# Altium PCB PCB1.PcbDoc (part 1 of 2)
Units mm, origin at the board's own origin, x right, y up, seen from the top; angles counter-clockwise.
Board outline 45.5 x 25.8 mm, 4 copper layers (Top Copper, Signal Layer 1, Signal Layer 2, Bottom Copper), stack 1.59 mm thick; 62 components, 46 nets, 226 pads, 305 vias.
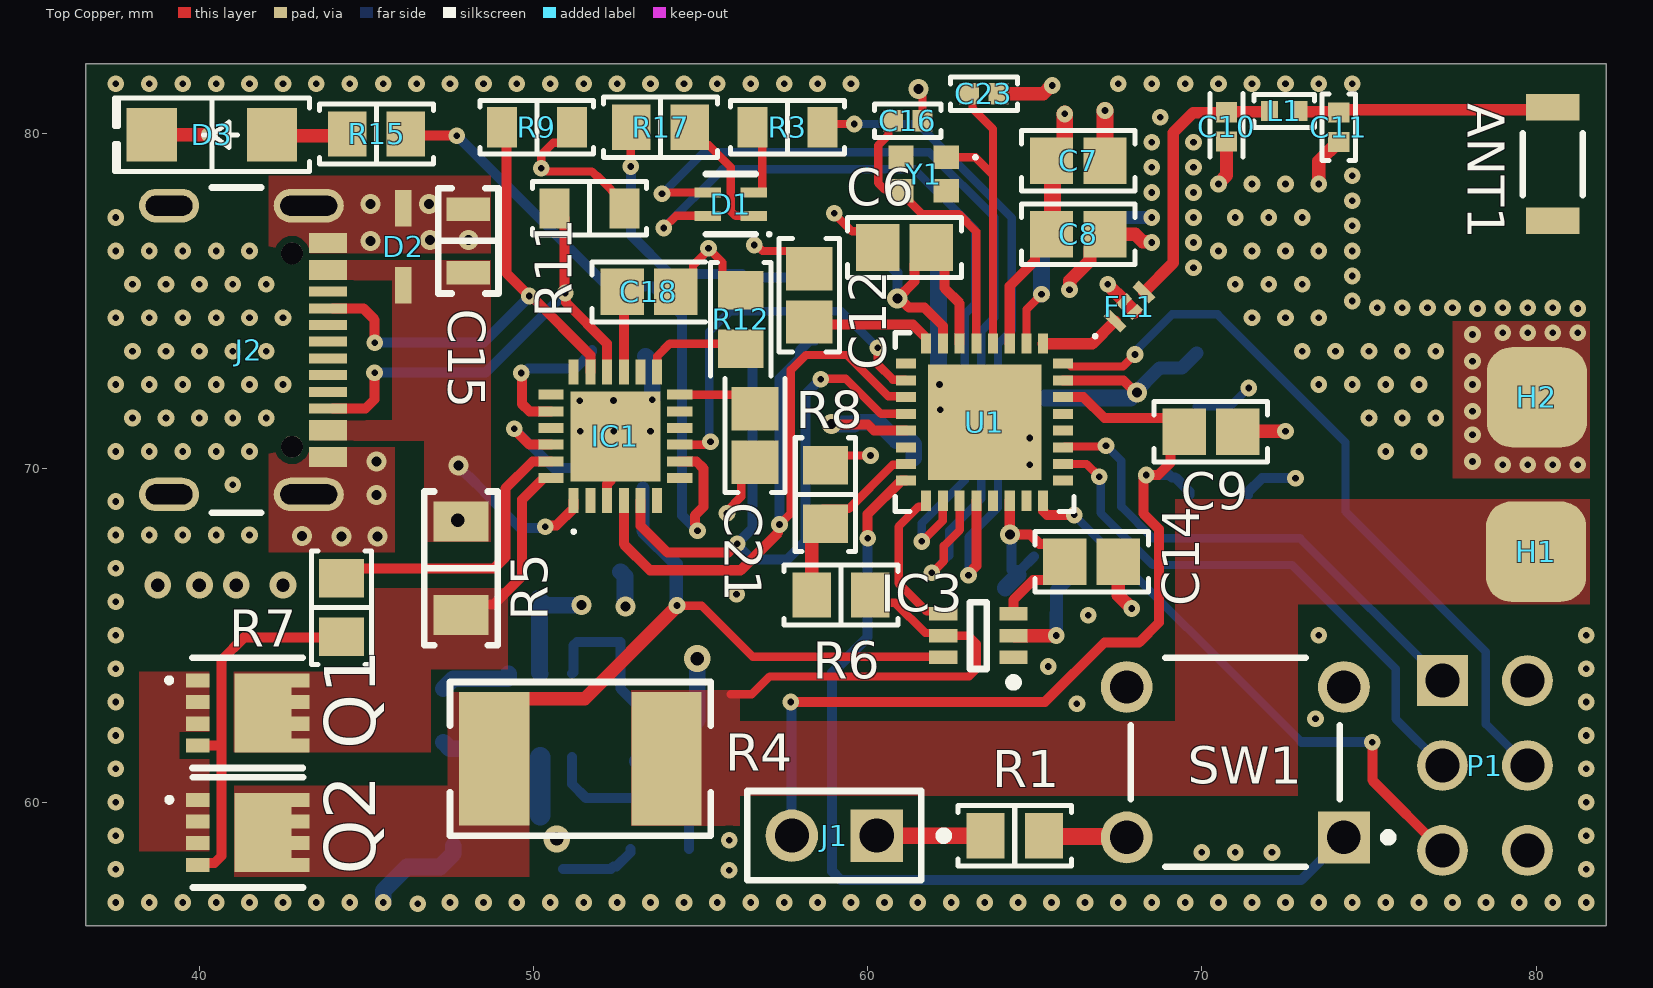
[diagram p0: Top Copper view]
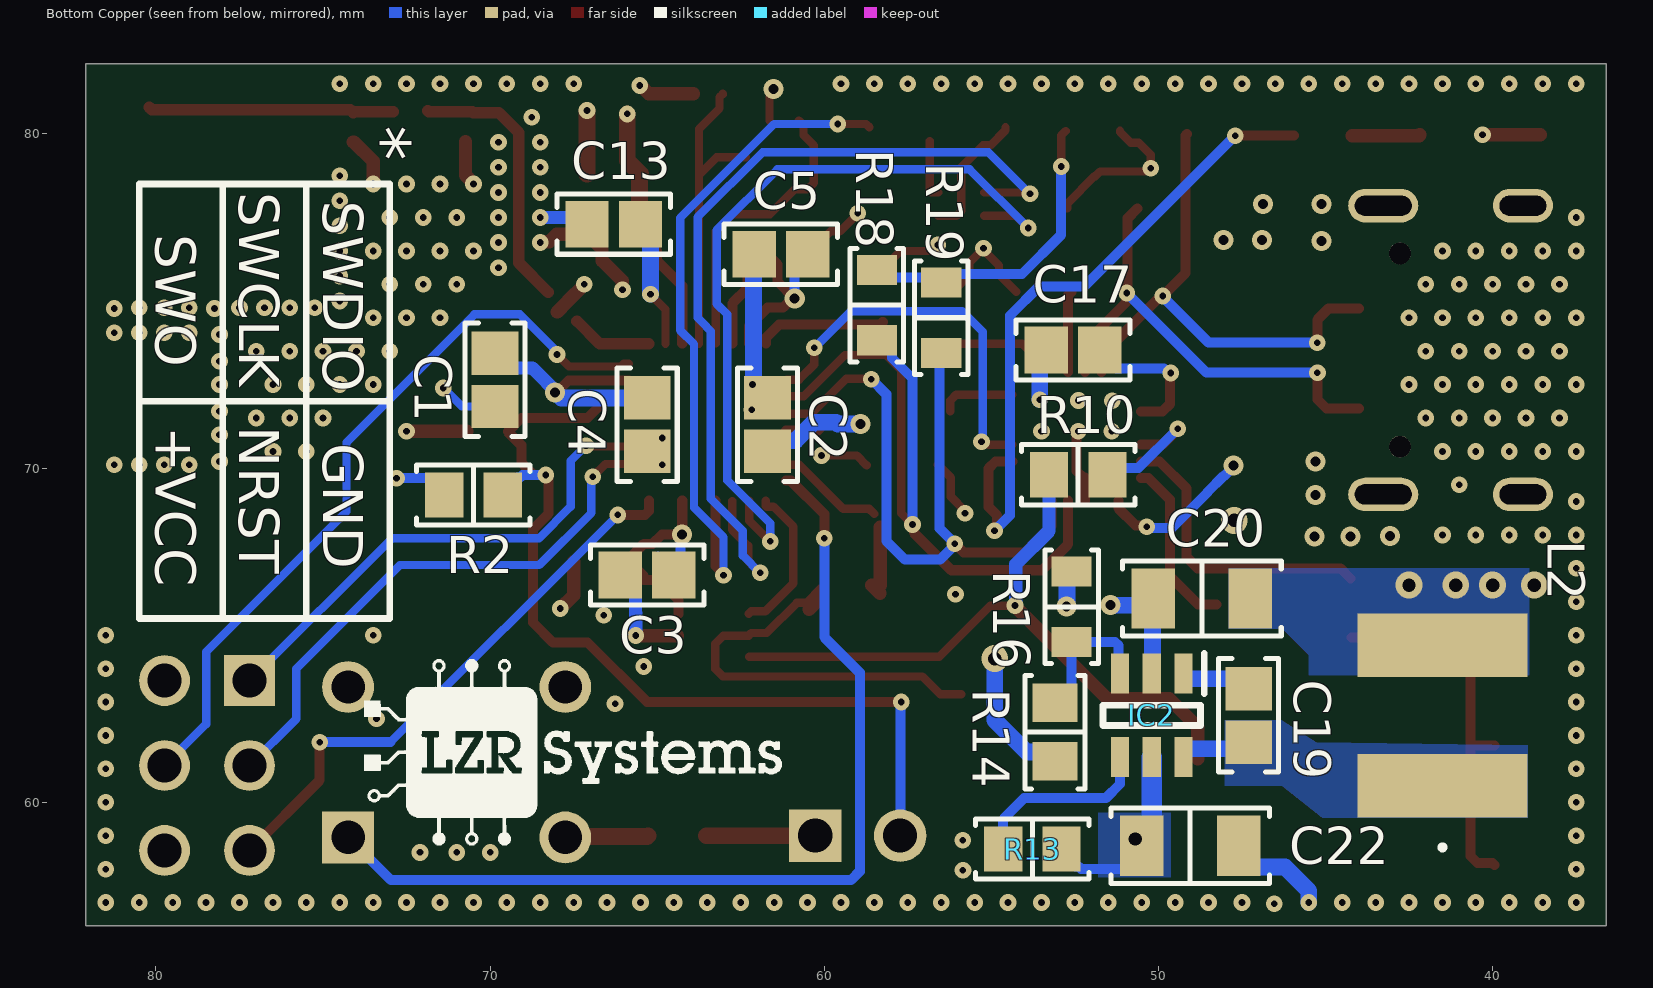
[diagram p1: Bottom Copper view, seen from below]
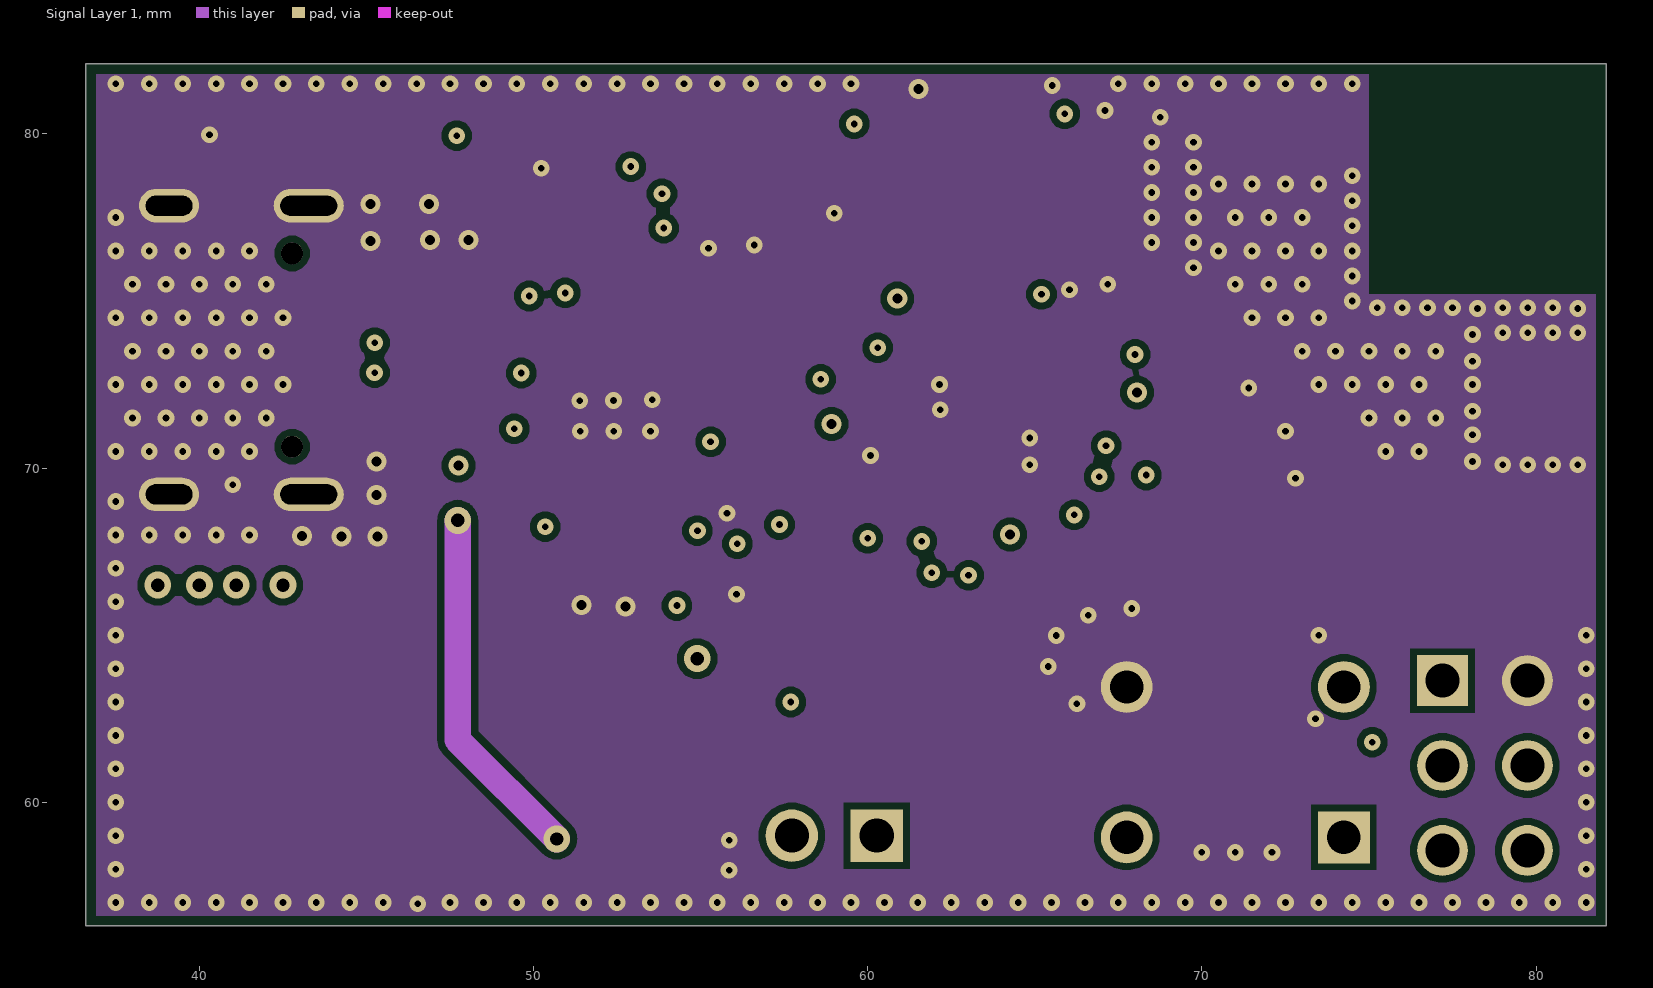
[diagram p2: Signal Layer 1]
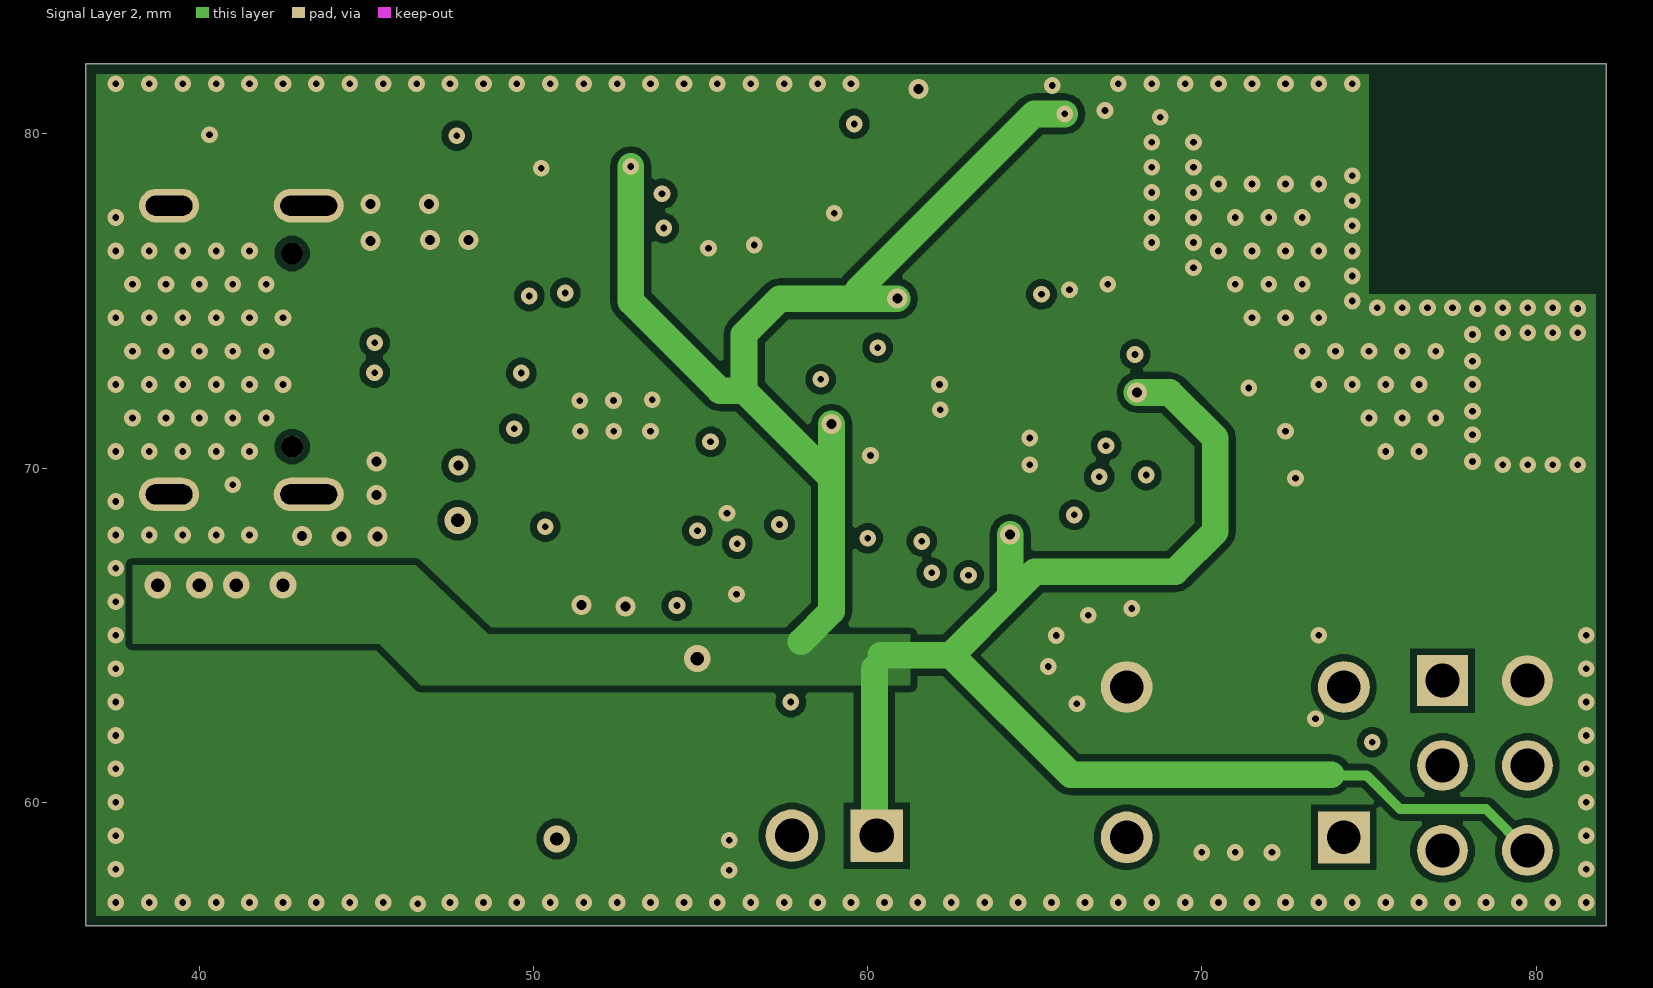
[diagram p3: Signal Layer 2]
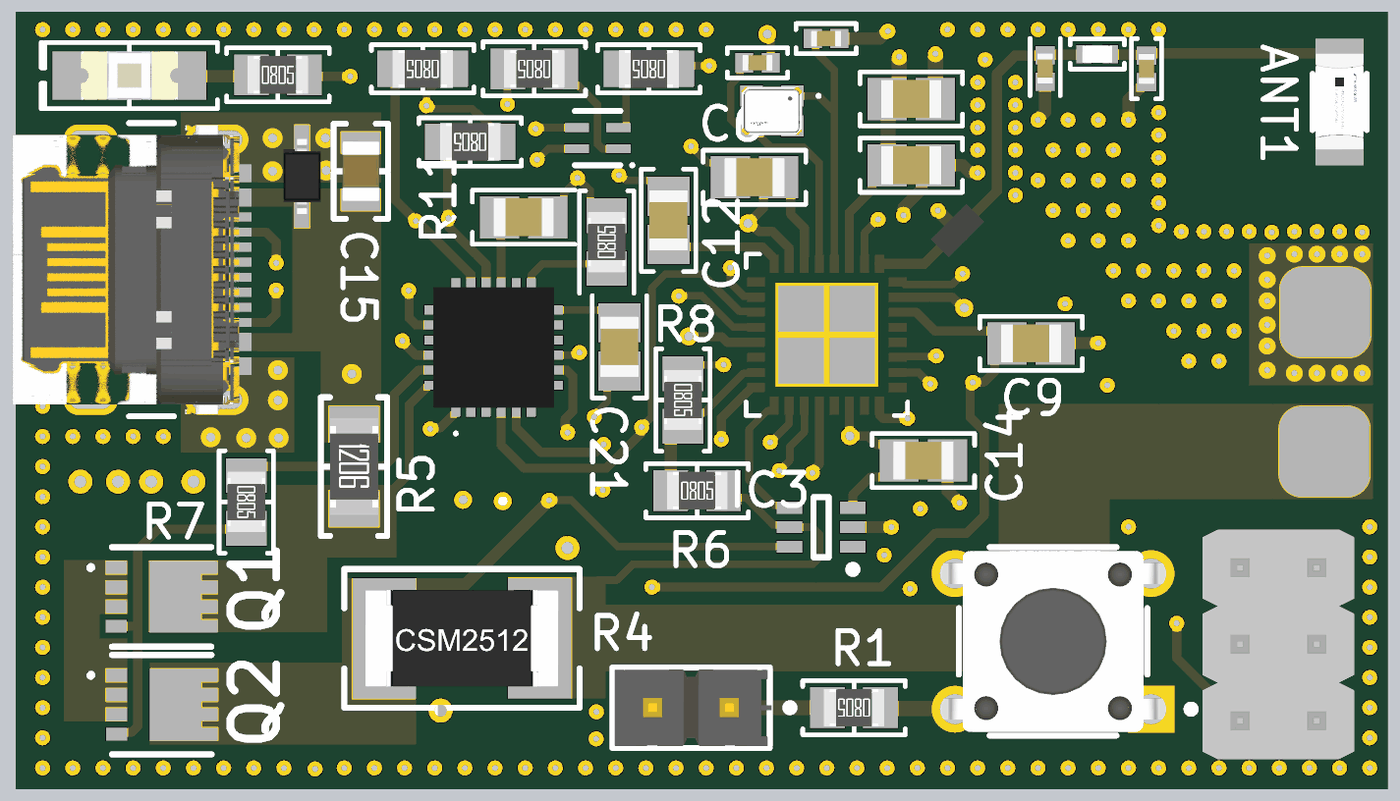
[diagram p4: 3D render of the assembled board from above, using the file's embedded part models]
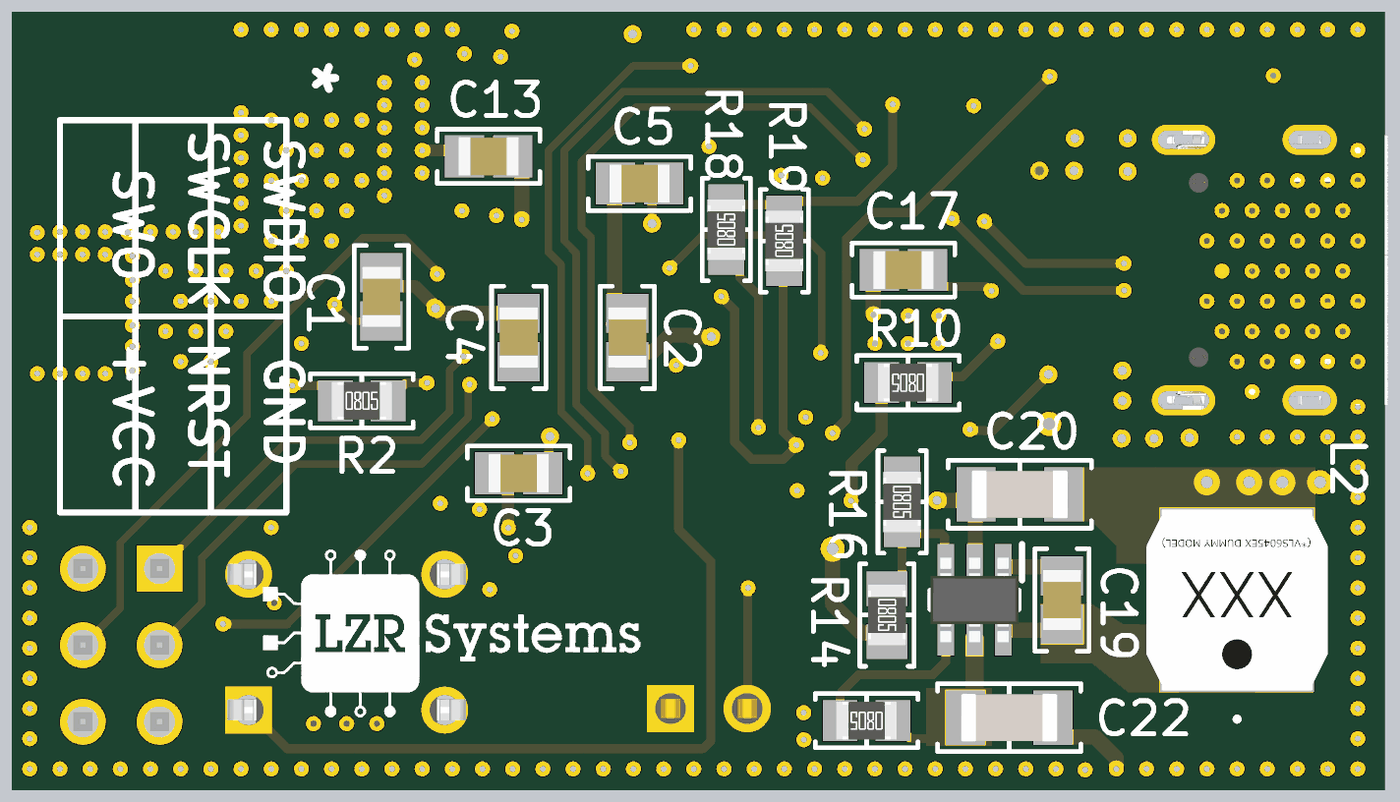
[diagram p5: 3D render of the assembled board from below, using the file's embedded part models]

## Layer stack, top to bottom
Top Mask: solder mask 0.015, Solder Resist, Dk 3.8
Top Copper: signal copper 0.035
Dielectric 1: prepreg 0.2104, 7628, Dk 4.6
Signal Layer 1: signal copper 0.0152
Core: core 1.065, FR-4, Dk 4.5
Signal Layer 2: signal copper 0.0152
Dielectric 2: prepreg 0.214, 7628, Dk 4.6
Bottom Copper: signal copper 0.035
Bottom Mask: solder mask 0.015, Solder Resist, Dk 3.8

## Board outline
36.6,56.3 36.6,82.1 82.1,82.1 82.1,56.3

## Design rules (kind name [scope] priority, off if disabled: settings)
BoardOutlineClearance [All] p1: gap=0.3 ignorepadtopadclearanceinfootprint=FALSE except(0.4: Arc-SplitBarrior Arc-SplitContinuation Track-SplitBarrior Track-SplitContinuation SMDPad-SplitBarrior SMDPad-SplitContinuation THPad-SplitBarrior THPad-SplitContinuation Via-SplitBarrior Via-SplitContinuation Fill-SplitBarrior Fill-SplitContinuation Poly-SplitBarrior Poly-SplitContinuation Region-SplitBarrior Region-SplitContinuation Text-SplitBarrior Text-SplitContinuation)
Clearance "Clearance Different Nets" [All] p1: gap=0.2 ignorepadtopadclearanceinfootprint=FALSE except(0.089: Arc-Arc Arc-Track Arc-SMDPad Track-Track Track-SMDPad; 0.127: SMDPad-SMDPad SMDPad-Via THPad-Via Via-Via; 0.15: Arc-Via Track-Via; 0.254: Arc-Text Track-Text SMDPad-Text THPad-Text Via-Text Fill-Text Poly-Text Region-Text Text-Text; 0.5: THPad-THPad Via-Hole)
Clearance "Clearance Same Nets" [All] p2: gap=0.2 ignorepadtopadclearanceinfootprint=FALSE except(0: SMDPad-THPad SMDPad-Via SMDPad-Fill SMDPad-Poly SMDPad-Region SMDPad-Hole THPad-Via Via-Fill Via-Poly Via-Region; 0.089: Arc-Arc Arc-Track Arc-SMDPad Track-Track Track-SMDPad SMDPad-SMDPad; 0.254: Arc-Via Arc-Text Track-Via Track-Text SMDPad-Text THPad-Text Via-Text Fill-Text Poly-Text Region-Text Text-Text)
Clearance "Clearance Bottom Layer" [OnLayer('Bottom Layer')] p3: gap=0.203 ignorepadtopadclearanceinfootprint=TRUE except(0.254: Arc-Text Track-Text SMDPad-Text THPad-Text Via-Text Fill-Text Poly-Text Region-Text Text-Text)
Clearance "Clearance Top Layer" [OnLayer('Top Layer')] p4: gap=0.203 ignorepadtopadclearanceinfootprint=TRUE except(0.254: Arc-Text Track-Text SMDPad-Text THPad-Text Via-Text Fill-Text Poly-Text Region-Text Text-Text)
ComponentClearance [All] p1 off: gap=0.254 collisioncheckmode=3 verticalgap=0.254 showdistances=FALSE
Height [All] p1 off: minheight=0 maxheight=25.4 prefheight=12.7
HoleSize [All] p1: absolutevalues=TRUE maxlimit=6.3 minlimit=0.2 maxpercent=80.000 minpercent=20.000
MinimumAnnularRing [All] p1: minimumring=0.13
MinimumSolderMaskSliver [All] p1: minsoldermaskwidth=0.1
PolygonConnect PolygonConnect_1 [All] p1: connectstyle=Direct reliefconductorwidth=0.508 reliefentries=4 polygonreliefangle="90 Angle" airgapwidth=0.254
RoutingCorners [All] p1: cornerstyle=Round minsetback=2.54 maxsetback=2.54
RoutingVias [All] p1: holewidth=0.3 width=0.6 viastyle="Through Hole" minholewidth=0.2 minwidth=0.35 maxholewidth=1 maxwidth=2
RoutingVias RoutingVias_1 [All] p2: holewidth=0.2 width=0.5 viastyle="Through Hole" minholewidth=0.2 minwidth=0.35 maxholewidth=1 maxwidth=2
SilkToSilkClearance [All] p1: silktosilkclearance=0.1
SilkToSolderMaskClearance [IsPad] p1: minsilkscreentomaskgap=0.1 clearancetoexposedcopper=TRUE
SolderMaskExpansion [All] p1: expansion=0.03 istentingtop=FALSE
SupplyNets "Schematic Supply Nets_3" [InNet('+VOUT')] p1: voltage=0.000
SupplyNets "Schematic Supply Nets_2" [InNet('+2.9V')] p2: voltage=0.000
SupplyNets "Schematic Supply Nets_1" [InNet('+VBUS')] p3: voltage=0.000
SupplyNets "Schematic Supply Nets" [InNet('GND')] p4: voltage=0.000
Width 50R [InNetClass('50R')] p1: maxlimit=0.351 minlimit=0.264 preferedwidth=0.351 toplayer_minwidth=0.345 toplayer_maxwidth=0.345 toplayer_prefwidth=0.345 midlayer1_maxwidth=0.264 midlayer1_prefwidth=0.264 midlayer2_minwidth=0.269 midlayer2_maxwidth=0.269 midlayer2_prefwidth=0.269 bottomlayer_minwidth=0.351 impedanceprofiledriven=TRUE impedanceprofileid={50FB1EAE-294E-47AF-B670-191B45C0B15C} impedanceprofilevalue=50.000000 minimp=50.000000 maximp=50.000000 favimp=50.000000
Width Width_1 [All] p2: maxlimit=10 minlimit=0.2 preferedwidth=0.25
23 further rules are at their usual default settings.

## Classes and differential pairs
component class U_PowerDelivery: C14 C15 C17 C18 C19 C20 C21 C22 D2 D3 H1 H2 IC1 IC2 IC3 J2 L2 Q1 Q2 R4 R5 R6 R7 R8 R9 R10 R11 R12 R13 R14 R15 R16
component class Control: ANT1 C1 C2 C3 C4 C5 C6 C7 C8 C9 C10 C11 C12 C13 C16 C23 D1 FL1 J1 L1 P1 R1 R2 R3 R17 R18 R19 SW1 U1 Y1

## Components (designator, comment, footprint, x,y, rotation, side; value= is the part's Value field where it differs from the comment)
ANT1 "AMCA31-2R450G-S1F-T3" FP-AMCA31-MFG 80.5,79.1 r270 top
C1 "4.7µF" "CAP 0805_2012" 69.85,72.644 r90 bottom
C2 "0.1 µF" "CAP 0805_2012" 61.7,71.3 r270 bottom
C3 "0.1 µF" "CAP 0805_2012" 65.3,66.8 r180 bottom
C4 "0.1 µF" "CAP 0805_2012" 65.3,71.3 r90 bottom
C5 "0.1 µF" "CAP 0805_2012" 61.3,76.4 r180 bottom
C6 "0.1 µF" "CAP 0805_2012" 61.1,76.6 r0 top
C7 "4.7µF" "CAP 0805_2012" 66.3,79.2 r180 top
C8 "0.1 µF" "CAP 0805_2012" 66.3,77 r180 top
C9 "0.1 µF" "CAP 0805_2012" 70.27,71.09 r180 top
C10 "3.6 pF" "CAP 0402_1005" 70.737,80.209 r90 top
C11 "3.6 pF" "CAP 0402_1005" 74.1,80.2 r90 top
C12 "4.7µF" "CAP 0805_2012" 58.25,75.172 r270 top
C13 "1µF" "CAP 0805_2012" 66.3,77.3 r0 bottom
C14 "0.1 µF" "CAP 0805_2012" 66.7,67.2 r180 top
C15 "10 µF" "MURATA GRM21B 0805_2012" 48.05,76.8 r270 top
C16 "10 pF" "CAP 0402_1005" 61.2,80.4 r180 top
C17 "1µF" "CAP 0805_2012" 52.555,73.533 r0 bottom
C18 "0.1 µF" "CAP 0805_2012" 53.45,75.275 r180 top
C19 "0.1 µF" "CAP 0805_2012" 47.3,62.6 r270 bottom
C20 "22 µF" "CAP 1206_3216 - 0.8MM" 48.7,66.1 r180 bottom
C21 "0.1 µF" "CAP 0805_2012" 56.625,70.975 r90 top
C22 "2.2 µF" "CAP 1206_3216 - 0.8MM" 49.05,58.7 r0 bottom
C23 "10 pF" "CAP 0402_1005" 63.475,81.2 r180 top
D1 "CLMUD-FKC-CH1NP1561BB7T4S3" SON70P150X100-4N 55.9,77.9 r180 top
D2 "PESD24VS1UA,115" SOD2512X110N 46.1,76.625 r90 top
D3 "Red" "LED 1206_3216 RED" 40.375,79.975 r180 top
FL1 "DLF162500LT-5028A1" DLF162500LT5028A1 67.833,74.833 r45 top
H1 "Solder Pad - 3x3mm" "Solder Pad - 3x3mm-Footprint-1"#1 80,67.5 r0 top
H2 "Solder Pad - 3x3mm" "Solder Pad - 3x3mm-Footprint-1"#2 80.026,72.118 r0 top
IC1 "AP33772SDKZ-13-FA01" AP33772SDKZ13FA01 52.45,70.95 r90 top
IC2 "DCP3601NMR" SOT95P280X125-6N 50.2,62.6 r270 bottom
IC3 "MCP6C26T-100E/LTY" SOT65P210X80-6N 63.312,64.989 r180 top
J1 "TSW-102-12-T-S" FP-TSW-102-12-T-S-MFG 59,59 r180 top
J2 "USB4105-GF-A" FP-USB4105-GF-A-MFG 40.258,73.533 r270 top
L1 "TBD" "IND 0402_1005" 72.465,80.688 r0 top value="3.9 nH"
L2 "VLS6045EX-150M" VLS6045 41.5,62.6 r90 bottom
P1 "MTLW-103-06-G-D-180" SMTC-MTLW-103-06-X-D-180 77.2,63.64 r270 top
Q1 "DMN3009SFG-7" DMTH8008LFGQ7 42.755,62.675 r270 top
Q2 "DMN3009SFG-7" DMTH8008LFGQ7 42.76,59.1 r270 top
R1 "10 k" "RES 0805_2012" 64.4,59 r180 top
R2 "10 k" "RES 0805_2012" 70.5,69.2 r180 bottom
R3 "68 Ohms" "YAGEO RES 0805_2012" 57.6,80.2 r180 top
R4 "5 mOhms" "STACKPOLE CSM2512" 51.4,61.3 r0 top value="40 mOhms"
R5 "10 mOhms" "RES 1206_3216" 47.825,67 r270 top
R6 "100 kOhms" "RES 0805_2012" 59.2,66.2 r0 top
R7 "10 Ohms" "RES 0805_2012" 44.25,65.825 r270 top
R8 "13 kOhms" "RES 0805_2012" 58.731,69.209 r270 top
R9 "5.1 kOhms" "YAGEO RES 0805_2012" 50.1,80.2 r180 top
R10 "100 Ohms" "RES 0805_2012" 52.4,69.8 r0 bottom
R11 "5.1 kOhms" "YAGEO RES 0805_2012" 51.675,77.775 r180 top
R12 "10 k" "RES 0805_2012" 56.2,74.45 r90 top
R13 "10 k" "RES 0805_2012" 53.775,58.6 r0 bottom
R14 "64.9 kOhms" "RES 0805_2012" 53.1,62.1 r270 bottom
R15 "1 kOhms" "RES 0805_2012" 45.3,80 r0 top
R16 "27 kOhms" "YAGEO RES 0805_2012" 52.6,65.85 r270 bottom
R17 "22 Ohms" "RES 0805_2012" 53.8,80.2 r180 top
R18 "5.1 k" "YAGEO RES 0805_2012" 58.423,74.876 r90 bottom
R19 "5.1 k" "YAGEO RES 0805_2012" 56.5,74.5 r90 bottom
SW1 "TL1105AF160Q" FP-TL1105AF160Q-MFG 71,61.2 r180 top
U1 "STM32WBA52KGU6_1" UFQFPN-32_STM 63.5,71.374 r0 top
Y1 "XRCGB32M000F2P01R0" XRCGB 61.675,78.8 r180 top

## Footprints (in the part's own frame and the unit in brackets; to place one, negate y for a bottom-side part, rotate by r counter-clockwise, add the part's x,y. Pads: shape width x height; smd on the part's side, far side on the other; paste and mask are expansions set on the pad)
AP33772SDKZ13FA01 [mm]
  rect 0.75x0.3 smd: 1(-1.925,1.25) 2(-1.925,0.75) 3(-1.925,0.25) 4(-1.925,-0.25) 5(-1.925,-0.75) 6(-1.925,-1.25) 13(1.925,-1.25) 14(1.925,-0.75) 15(1.925,-0.25) 16(1.925,0.25) 17(1.925,0.75) 18(1.925,1.25)
  rect 0.3x0.75 smd: 7(-1.25,-1.925) 8(-0.75,-1.925) 9(-0.25,-1.925) 10(0.25,-1.925) 11(0.75,-1.925) 12(1.25,-1.925) 19(1.25,1.925) 20(0.75,1.925) 21(0.25,1.925) 22(-0.25,1.925) 23(-0.75,1.925) 24(-1.25,1.925)
  rect 2.7x2.7 smd: 25(0,0)
  silkscreen extent -2.9,1.2 -2.8,1.3, body extent -2,-2 2,2, height 0.75
"CAP 0402_1005" [mm] "Chip Capacitor, 2-Leads, Body 1.02x0.51mm, IPC Medium Density"
  rect 0.6x0.64 smd: 1(-0.44,0) 2(0.44,0)
  silkscreen extent -0.9,-0.5 1,0.5, body extent -0.5,-0.26 0.5,0.26, height 0.52
"CAP 0805_2012" [mm] "Chip Capacitor, 2-Leads, Body 2.00x1.20mm, IPC Medium Density"
  rect 1.3x1.4 smd: 1(-0.8,0) 2(0.8,0)
  silkscreen extent -1.7,-0.9 1.7,0.9, body extent -1,-0.64 1,0.64, height 1.26
"CAP 1206_3216 - 0.8MM" [mm] "Chip Capacitor, 2-Leads, Body 3.25x1.60mm, IPC Medium Density"
  rect 1.3x1.8 smd: 1(-1.45,0) 2(1.45,0)
  silkscreen extent -2.37,-1.12 2.37,1.12, body extent -1.6,-0.8 1.6,0.8, height 0.8
DLF162500LT5028A1 [mm]
  rect 0.275x0.7 smd: 1(-0.612,0) 3(0.613,0)
  rect 0.45x0.245 smd: 2(0,-0.227) 4(0,0.227)
  silkscreen extent -1.4,0.05 -1.3,0.15, body extent -0.83,-0.42 0.83,0.42, height 0.26
DMTH8008LFGQ7 [mm]
  rect 0.42x0.7 smd: 1(-0.975,-2.81) 2(-0.325,-2.81) 3(0.325,-2.81) 4(0.975,-2.81)
  rect 0.42x0.54 smd: 5(0.975,0.27) 6(0.325,0.27) 7(-0.325,0.27) 8(-0.975,0.27)
  rect 2.37x1.71 smd: 9(0,-0.855)
  silkscreen extent -1.65,-3.71 1.65,0.34
FP-AMCA31-MFG [mm]
  rect 0.8x1.6 smd paste+0 mask+0: 1(-1.7,0) 2(1.7,0)
  silkscreen extent -0.92,-0.9 0.92,0.9, body extent -2.2,-1 2.2,1, height 0.25
FP-TL1105AF160Q-MFG [mm]
  rect 1.55x1.55 hole 1 paste-2539.97 mask+0: 1(-3.25,2.25)
  round 1.55 hole 1 paste-2539.97 mask+0: 2(3.25,2.25) 3(-3.25,-2.25) 4(3.25,-2.25)
  silkscreen extent -4.7,-3.13 3.13,3.13, body extent -4.13,-3.22 4.13,3.22, height 0.25
FP-TSW-102-12-T-S-MFG [mm]
  rect 1.57x1.57 hole 1.02 paste-2539.97 mask+0: 1(-1.27,0)
  round 1.57 hole 1.02 paste-2539.97 mask+0: 2(1.27,0)
  silkscreen extent -3.4,-1.34 2.61,1.34, body extent -2.71,-1.44 2.71,1.44, height 0.25
FP-USB4105-GF-A-MFG [mm]
  rrect100% 1x2.1 hole 1.7 slot 0.6 at 0 deg paste-2539.97 mask+0: 1(-4.32,3.015) 2(4.32,3.015)
  rrect100% 1x1.8 hole 1.4 slot 0.6 at 0 deg paste-2539.97 mask+0: 3(-4.32,-1.165) 4(4.32,-1.165)
  rect 0.6x1.15 smd paste+0 mask+0: A1-B12(-3.2,3.59) A4-B9(-2.4,3.59) B1-A12(3.2,3.59) B4-A9(2.4,3.59)
  rect 0.3x1.15 smd paste+0 mask+0: A5(-1.25,3.59) A6(-0.25,3.59) A7(0.25,3.59) A8(1.25,3.59) B5(1.75,3.59) B6(0.75,3.59) B7(-0.75,3.59) B8(-1.75,3.59)
  round 0.65 hole 0.65 unplated paste-2539.97 mask+0: ""(-2.89,2.515) ""(2.89,2.515)
  silkscreen extent -4.86,0.11 4.86,1.59, body extent -4.96,-3.94 4.96,4.27, height 0.25
"IND 0402_1005" [mm] "Inductor, 2-Leads, Body 1.02x0.51mm, IPC Medium Density"
  rect 0.5x0.6 smd: 1(-0.44,0) 2(0.44,0)
  silkscreen extent -0.9,-0.5 0.9,0.5, body extent -0.5,-0.3 0.5,0.3, height 0.6
"LED 1206_3216 RED" [mm] "Chip Diode, 2-Leads, Body 3.13x1.55mm, IPC Medium Density"
  rect 1.5x1.6 smd: 1(-1.8,0) 2(1.8,0)
  silkscreen extent -2.92,-1.1 2.92,1.1, body extent -1.6,-0.8 1.6,0.8, height 0.9
"MURATA GRM21B 0805_2012" [mm] "Chip Capacitor, 2-Leads, Body 2.00x1.25mm"
  rect 0.7x1.3 smd: 1(-0.95,0) 2(0.95,0)
  silkscreen extent -1.58,-0.9 1.58,0.9, body extent -1,-0.63 1,0.63, height 1.25
"RES 0805_2012" [mm] "Chip Resistor, 2-Leads, Body 2.00x1.25mm, IPC Medium Density"
  rect 1.15x1.35 smd: 1(-0.875,0) 2(0.875,0)
  silkscreen extent -1.7,-0.9 1.7,0.9, body extent -1,-0.62 1,0.63, height 0.6
"RES 1206_3216" [mm] "Chip Resistor, 2-Leads, Body 3.13x1.55mm, IPC Medium Density"
  rect 1.2x1.65 smd: 1(-1.4,0) 2(1.4,0)
  silkscreen extent -2.3,-1.1 2.3,1.1, body extent -1.6,-0.8 1.6,0.8, height 0.6
SMTC-MTLW-103-06-X-D-180 [mm] "Terminal Assembly, 2x3 Pins, Vertical, 2.54mm Pitch, Male"
  rect 1.52x1.52 hole 1.02: 1(0,0)
  round 1.52 hole 1.02: 2(0,2.54) 3(2.54,0) 4(2.54,2.54) 5(5.08,0) 6(5.08,2.54)
  body extent -1.27,-1.24 6.35,3.78, height 6.1
SOD2512X110N [mm]
  rect 1.1x0.5 smd: 1(-1.15,0) 2(1.15,0)
  body extent -1.24,-0.63 1.24,0.62, height 0.93
"Solder Pad - 3x3mm-Footprint-1"#1 [mm]
  rrect50% 3x3 smd: 1(0,0)
"Solder Pad - 3x3mm-Footprint-1"#2 [mm]
  rrect50% 3x3 smd: 1(0,0.002)
SON70P150X100-4N [mm] "SON, 4-Leads, Body 1.50x1.50mm, Pitch 0.70mm, IPC Medium Density"
  rect 0.8x0.3 smd: 1(-0.69,0.35) 2(-0.69,-0.35) 3(0.69,-0.35) 4(0.69,0.35)
  silkscreen extent -1.2,-0.9 0.75,0.95, body extent -0.75,-0.75 0.75,0.75, height 1
SOT65P210X80-6N [mm] "SOT23, 6-Leads, Body 2.00x2.10mm, Pitch 0.65mm, IPC Medium Density"
  rect 0.85x0.4 smd: 1(-1.05,0.65) 2(-1.05,0) 3(-1.05,-0.65) 4(1.05,-0.65) 5(1.05,0) 6(1.05,0.65)
  silkscreen extent -1.18,-1 0.25,1.52, body extent -0.63,-1 0.63,1, height 0.8
SOT95P280X125-6N [mm]
  rect 1.2x0.55 smd: 1(-1.25,0.95) 2(-1.25,0) 3(-1.25,-0.95) 4(1.25,-0.95) 5(1.25,0) 6(1.25,0.95)
  silkscreen extent -1.85,-1.46 0.3,1.58, body extent -1.4,-1.46 1.4,1.46, height 1.25
"STACKPOLE CSM2512" [mm] "Chip Resistor, 2-Leads, Body 6.40x3.20mm, IPC Medium Density"
  rect 2.1x4 smd: 1(-2.575,0) 2(2.575,0)
  silkscreen extent -3.9,-2.3 3.9,2.3, body extent -3.2,-1.6 3.2,1.6, height 0.7
UFQFPN-32_STM [mm]
  rect 0.6x0.3 smd paste-0.15 mask-0.305: 1(-2.35,1.75) 2(-2.35,1.25) 3(-2.35,0.75) 4(-2.35,0.25) 5(-2.35,-0.25) 6(-2.35,-0.75) 7(-2.35,-1.25) 8(-2.35,-1.75) 17(2.35,-1.75) 18(2.35,-1.25) 19(2.35,-0.75) 20(2.35,-0.25) 21(2.35,0.25) 22(2.35,0.75) 23(2.35,1.25) 24(2.35,1.75)
  rect 0.3x0.6 smd paste-0.15 mask-0.305: 9(-1.75,-2.35) 10(-1.25,-2.35) 11(-0.75,-2.35) 12(-0.25,-2.35) 13(0.25,-2.35) 14(0.75,-2.35) 15(1.25,-2.35) 16(1.75,-2.35) 25(1.75,2.35) 26(1.25,2.35) 27(0.75,2.35) 28(0.25,2.35) 29(-0.25,2.35) 30(-0.75,2.35) 31(-1.25,2.35) 32(-1.75,2.35)
  rect 3.4x3.45 smd paste-1.712 mask+0: 33(0,0)
  silkscreen extent -2.68,-2.68 2.68,2.68
VLS6045 [mm]
  rect 1.9x5.1 smd: 1(-2.1,0) 2(2.1,0)
  silkscreen extent -4,-0.05 -3.9,0.05, body extent -3,-3 3,3, height 4.5
XRCGB [mm]
  rect 0.75x0.7 smd: 1(-0.675,-0.5) 2(0.675,-0.5) 3(0.675,0.5) 4(-0.675,0.5)
  silkscreen extent -1.6,-0.55 -1.5,-0.45, body extent -1,-0.8 1,0.8, height 0.7
"YAGEO RES 0805_2012" [mm] "Chip Resistor, 2-Leads, Body 2.00x1.25mm"
  rect 0.9x1.2 smd: 1(-1.05,0) 2(1.05,0)
  silkscreen extent -1.7,-0.8 1.7,0.8, body extent -1,-0.62 1,0.63, height 0.6

## Part data
ANT1: library part CMP-00025-00003-1, "Chip Dielectric Antenna; 1dBi; 2450MHz; T/R", Case/Package=SMD/SMT, Frequency=2.45GHz, Max Operating Temperature=85°C, Min Operating Temperature=-40°C, Mounting Technology="Surface Mount"
C1 C7 C12: library part 0805ZD475KAT2A, "CAP CER 4.7UF 10V X5R 0805", Device Package="0805 (2012 Metric)", manufacturer="AVX Corporation", Operating Temperature="-55°C ~ 85°C", Supplier Part Number 1=478-1415-1-ND, Temperature Coefficient=X5R, Tolerance=±10%, Voltage - Rated=10V, Applications="General Purpose", Capacitance=4.7µF, componentlink1description=Datasheet, componentlink1url=http://datasheets.avx.com/cx5r.pdf, componentlink2description="DigiKey Link", componentlink2url=http://digikey.com/product-detail/en/avx-corporation/0805ZD475KAT2A/478-1415-1-ND/564447, lastupdated="9/2/2020 1:04:40 AM", Lifecycle Status=Active, Minimum Order=1, Mounting Type="Surface Mount, MLCC", Package / Case="0805 (2012 Metric)", packaging=TapeAndReel, Part Number=0805ZD475KAT2A, Part Status=Active, partid=3139, price=0.12, series=-, Size / Dimension="0.079\" L x 0.049\" W (2.01mm x 1.25mm)", Supplier 1=DigiKey, Thickness (Max)="0.055\" (1.40mm)"
C2 C3 C4 C5 C6 C8 C9: library part KGM21NR71H104MT, "CAP CER 0.1UF 50V X7R 0805", Device Package="0805 (2012 Metric)", manufacturer="KYOCERA AVX", Operating Temperature="-55°C ~ 125°C", Supplier Part Number 1=478-KGM21NR71H104MTCT-ND, Temperature Coefficient=X7R, Tolerance=±20%, Voltage - Rated=50V, Applications="General Purpose", Capacitance="0.1 µF", componentlink1description=Datasheet, componentlink1url=https://datasheets.kyocera-avx.com/X7RDielectric.pdf, componentlink2description="DigiKey Link", componentlink2url=https://www.digikey.com/en/products/detail/kyocera-avx/KGM21NR71H104MT/929983, lastupdated="2/9/2024 8:14:06 PM", Lifecycle Status=Active, Minimum Order=1, Mounting Type="Surface Mount, MLCC", Package / Case="0805 (2012 Metric)", packaging=TapeAndReel, Part Number=KGM21NR71H104MT, Part Status=Active, partid=53901, price=0.01, series="KGM - X7R", Size / Dimension="0.079\" L x 0.049\" W (2.01mm x 1.25mm)", Supplier 1=DigiKey, Thickness (Max)="0.039\" (1.00mm)"
C10 C11: library part 600L3R6AT200T, "CAP CER 3.6PF 200V C0G/NP0 0402", Capacitance=TBD, Device Package="0402 (1005 Metric)", manufacturer="American Technical Ceramics", Operating Temperature="-55°C ~ 125°C", Supplier Part Number 1=1284-1126-1-ND, Temperature Coefficient="C0G, NP0", Tolerance=±0.05pF, Voltage - Rated=200V, Applications="RF, Microwave, High Frequency, Bypass, Decoupling", componentlink1description=Datasheet, componentlink1url=http://www.atceramics.com/UserFiles/600l.pdf, componentlink2description="DigiKey Link", componentlink2url=https://www.digikey.com/en/products/detail/american-technical-ceramics/600L3R6AT200T/3905167, Features="High Q, Low Loss, Ultra Low ESR", lastupdated="2/9/2024 8:04:37 PM", Lifecycle Status=Active, Minimum Order=1, Mounting Type="Surface Mount, MLCC", Package / Case="0402 (1005 Metric)", packaging=TapeAndReel, Part Number=600L3R6AT200T, Part Status=Active, partid=2064, price=0.49, series="ATC 600L", Size / Dimension="0.040\" L x 0.020\" W (1.02mm x 0.51mm)", Supplier 1=DigiKey, Thickness (Max)="0.024\" (0.60mm)"
C13 C17: library part 08053C105KAT2A, "CAP CER 1UF 25V X7R 0805", Device Package="0805 (2012 Metric)", manufacturer="AVX Corporation", Operating Temperature="-55°C ~ 125°C", Supplier Part Number 1=478-5030-1-ND, Temperature Coefficient=X7R, Tolerance=±10%, Voltage - Rated=25V, Applications="General Purpose", Capacitance=1µF, componentlink1description=Datasheet, componentlink1url=http://datasheets.avx.com/X7RDielectric.pdf, componentlink2description="DigiKey Link", componentlink2url=http://digikey.com/product-detail/en/avx-corporation/08053C105KAT2A/478-5030-1-ND/1888241, lastupdated="9/2/2020 1:04:33 AM", Lifecycle Status=Active, Minimum Order=1, Mounting Type="Surface Mount, MLCC", Package / Case="0805 (2012 Metric)", packaging=TapeAndReel, Part Number=08053C105KAT2A, Part Status=Active, partid=7289, price=0.04, series=-, Size / Dimension="0.079\" L x 0.049\" W (2.01mm x 1.25mm)", Supplier 1=DigiKey, Thickness (Max)="0.037\" (0.94mm)"
C14 C18 C19 C21: library part CC0805MRX7R9BB104, "CAP CER 0.1UF 50V X7R 0805", Device Package="0805 (2012 Metric)", manufacturer=Yageo, Operating Temperature="-55°C ~ 125°C", Supplier Part Number 1=311-4351-1-ND, Temperature Coefficient=X7R, Tolerance=±20%, Voltage - Rated=50V, Applications="General Purpose", Capacitance="0.1 µF", componentlink1description=Datasheet, componentlink1url=https://www.yageo.com/upload/media/product/productsearch/datasheet/mlcc/UPY-GPHC_X7R_6.3V-to-50V_18.pdf, componentlink2description="DigiKey Link", componentlink2url=https://www.digikey.com/en/products/detail/yageo/CC0805MRX7R9BB104/5884281, lastupdated="2/9/2024 8:16:09 PM", Lifecycle Status=Active, Minimum Order=1, Mounting Type="Surface Mount, MLCC", Package / Case="0805 (2012 Metric)", packaging=TapeAndReel, Part Number=CC0805MRX7R9BB104, Part Status=Active, partid=2475, price=0.01, series=CC, Size / Dimension="0.079\" L x 0.049\" W (2.00mm x 1.25mm)", Supplier 1=DigiKey, Thickness (Max)="0.037\" (0.95mm)"
C15: library part GRM21BR61H106KE43L, "CAP CER 10UF 50V X5R 0805", Device Package="0805 (2012 Metric)", manufacturer="Murata Electronics", Operating Temperature="-55°C ~ 85°C", Supplier Part Number 1=490-18663-1-ND, Temperature Coefficient=X5R, Tolerance=±10%, Voltage - Rated=50V, Applications="Mobile Devices Only", Capacitance="10 µF", componentlink1description=Datasheet, componentlink1url=https://search.murata.co.jp/Ceramy/image/img/A01X/G101/ENG/GRM21BR61H106KE43-01A.pdf, componentlink2description="DigiKey Link", componentlink2url=https://www.digikey.com/en/products/detail/murata-electronics/GRM21BR61H106KE43L/10326316, lastupdated="8/27/2024 9:29:56 AM", Lifecycle Status=Active, Minimum Order=1, Mounting Type="Surface Mount, MLCC", Package / Case="0805 (2012 Metric)", packaging=TapeAndReel, Part Number=GRM21BR61H106KE43L, Part Status=Active, partid=39284, price=0.05, series=GRM, Size / Dimension="0.079\" L x 0.049\" W (2.00mm x 1.25mm)", Supplier 1=DigiKey, Thickness (Max)="0.057\" (1.45mm)"
C16 C23: library part 600L100FW200T, "CAP CER 10PF 200V NP0 0402", Device Package="0402 (1005 Metric)", manufacturer="American Technical Ceramics", Operating Temperature="-55°C ~ 125°C", Supplier Part Number 1=1284-1864-1-ND, Temperature Coefficient="C0G, NP0", Tolerance=±1%, Voltage - Rated=200V, Applications="RF, Microwave, High Frequency, Bypass, Decoupling", Capacitance="10 pF", componentlink1description=Datasheet, componentlink1url=http://www.atceramics.com/UserFiles/600l.pdf, componentlink2description="DigiKey Link", componentlink2url=https://www.digikey.com/en/products/detail/american-technical-ceramics/600L100FW200T/3908910, Features="High Q, Low Loss, Ultra Low ESR", lastupdated="2/9/2024 8:04:33 PM", Lifecycle Status=Active, Minimum Order=1, Mounting Type="Surface Mount, MLCC", Package / Case="0402 (1005 Metric)", packaging=TapeAndReel, Part Number=600L100FW200T, Part Status=Active, partid=4311, price=0.49, series="ATC 600L", Size / Dimension="0.040\" L x 0.020\" W (1.02mm x 0.51mm)", Supplier 1=DigiKey, Thickness (Max)="0.024\" (0.60mm)"
C20: library part CL31A226MOCLNNC, "CAP CER 22UF 16V X5R 1206", Device Package="1206 (3216 Metric)", manufacturer="Samsung Electro-Mechanics", Operating Temperature="-55°C ~ 85°C", Supplier Part Number 1=1276-2728-1-ND, Temperature Coefficient=X5R, Tolerance=±20%, Voltage - Rated=16V, Applications="General Purpose", Capacitance="22 µF", componentlink1description=Datasheet, componentlink1url=http://www.samsungsem.com/kr/support/product-search/mlcc/CL31A226MOCLNNC.jsp, componentlink2description="DigiKey Link", componentlink2url=https://www.digikey.com/en/products/detail/samsung-electro-mechanics/CL31A226MOCLNNC/3888386, Features="Low Profile", lastupdated="6/4/2024 7:10:40 PM", Lifecycle Status=Active, Minimum Order=1, Mounting Type="Surface Mount, MLCC", Package / Case="1206 (3216 Metric)", packaging=TapeAndReel, Part Number=CL31A226MOCLNNC, Part Status=Active, partid=19106, price=0.04, series=CL, Size / Dimension="0.126\" L x 0.063\" W (3.20mm x 1.60mm)", Supplier 1=DigiKey, Thickness (Max)="0.037\" (0.95mm)"
C22: library part GCJ31CR71H225KA12K, "CAP CER 2.2UF 50V X7R 1206", Device Package="1206 (3216 Metric)", manufacturer="Murata Electronics", Operating Temperature="-55°C ~ 125°C", Ratings=AEC-Q200, Supplier Part Number 1=490-GCJ31CR71H225KA12KCT-ND, Temperature Coefficient=X7R, Tolerance=±10%, Voltage - Rated=50V, Applications="Automotive, Boardflex Sensitive", Capacitance="2.2 µF", componentlink1description=Datasheet, componentlink1url=https://search.murata.co.jp/Ceramy/image/img/A01X/G101/ENG/GCJ31CR71H225KA12-01.pdf, componentlink2description="DigiKey Link", componentlink2url=https://www.digikey.com/en/products/detail/murata-electronics/GCJ31CR71H225KA12K/11618649, Features="Soft Termination", lastupdated="6/4/2024 7:10:16 PM", Lifecycle Status=Active, Minimum Order=1, Mounting Type="Surface Mount, MLCC", Package / Case="1206 (3216 Metric)", packaging=TapeAndReel, Part Number=GCJ31CR71H225KA12K, Part Status=Active, partid=30270, price=0.06, series=GCJ, Size / Dimension="0.126\" L x 0.063\" W (3.20mm x 1.60mm)", Supplier 1=DigiKey, Thickness (Max)="0.075\" (1.90mm)"
D1: library part CMP-007-00044-3, "Cree LED RGB LED Common Annode If=10mA Vf = 1.9/2.6/2.7"
D2: "Diode ESD (Uni-directional)", Manufacturer_Name=Nexperia, Mouser Part Number=771-PESD24VS1UA115, Arrow Part Number=PESD24VS1UA,115, Arrow Price/Stock=https://www.arrow.com/en/products/pesd24vs1ua115/nexperia, Datasheet Link=https://assets.nexperia.com/documents/data-sheet/PESD24VS1UA.pdf, Height=1.1mm, Manufacturer_Part_Number=PESD24VS1UA,115, Mouser Price/Stock=https://www.mouser.co.uk/ProductDetail/Nexperia/PESD24VS1UA115?qs=A1cBxND5mHKZ%252BhkKKiwSEA%3D%3D
D3: library part 5990210007F, "LED RED 1206 SMD", Current - Test=20mA, Device Package="1206 (3216 Metric)", Lens Color=0.80mm, manufacturer=Dialight, Millicandela Rating=29mcd, Supplier Device Package=1206, Supplier Part Number 1=350-4360-1-ND, Voltage - Forward (Vf) (Typ)=2.1V, Color=Red, componentlink1description=Datasheet, componentlink1url=http://www.dialightsignalsandcomponents.com/Assets/Brochures_And_Catalogs/Indication/CBI_SMD_new/Dialight_CBI_data_599-1206_Apr2018.pdf, componentlink2description="DigiKey Link", componentlink2url=https://www.digikey.com/en/products/detail/dialight/5990210007F/9385415, Configuration=Standard, Height (Max)=0.80mm, lastupdated="6/3/2024 8:00:41 PM", Lens Size="2.00mm x 1.60mm", Lens Style="Rectangle with Flat Top", Lifecycle Status=Active, Minimum Order=1, Mounting Type="Surface Mount", Package / Case="1206 (3216 Metric)", packaging=TapeAndReel, Part Number=5990210007F, Part Status=Active, partid=188, price=0.04, series=599, Size / Dimension="3.20mm L x 1.60mm W", Supplier 1=DigiKey, Viewing Angle=140°, Wavelength - Dominant=633nm
FL1: "Filter", Manufacturer_Name=TDK, Mouser Part Number=810-DLF16250LT5028A1, Arrow Part Number=DLF162500LT-5028A1, Arrow Price/Stock=https://www.arrow.com/en/products/dlf162500lt-5028a1/tdk?utm_currency=USD&region=nac, Datasheet Link=https://product.tdk.com/system/files/dam/doc/product/rf/rf/filter/catalog/rf_lpf_dlf162500lt-5028a1_en.pdf, Height=0.4mm, Manufacturer_Part_Number=DLF162500LT-5028A1, Mouser Price/Stock=https://www.mouser.co.uk/ProductDetail/TDK/DLF162500LT-5028A1?qs=U%2FZX79kHR%2FlwIbAISCs3qA%3D%3D
H1 H2: library part CMP-002-00073-4, "Wire to board solder pad rectangular 3x3mm"
IC1: "Integrated Circuit", Manufacturer_Name="Diodes Incorporated", Mouser Part Number=621-P33772SDKZ13FA01, Datasheet Link=https://www.diodes.com/datasheet/download/AP33772S.pdf, Height=0.8mm, Manufacturer_Part_Number=AP33772SDKZ-13-FA01, Mouser Price/Stock=https://www.mouser.co.uk/ProductDetail/Diodes-Incorporated/AP33772SDKZ-13-FA01?qs=2wMNvWM5ZX4CLYQ4%252BLyimw%3D%3D
IC2: "Integrated Circuit", Manufacturer_Name=STMicroelectronics, Mouser Part Number=511-DCP3601NMR, Datasheet Link=https://www.st.com/resource/en/datasheet/dcp3601.pdf, Height=1.25mm, Manufacturer_Part_Number=DCP3601NMR, Mouser Price/Stock=https://www.mouser.co.uk/ProductDetail/STMicroelectronics/DCP3601NMR?qs=VVKQmw408U%252BduQkqjRfAvg%3D%3D
IC3: library part CMP-014-00006-1, "Current Sense Amplifiers Zero-Drift, Current Sense Amplifier, Gain = 100V/V, REEL", Pins=6
J1: library part CMP-002-00077-1, "Pin Header, Board-to-Board, 2.54 mm, 1 Rows, 2 Contacts, Through Hole, TSW Series", Max Operating Temperature=105°C, Min Operating Temperature=-55°C, Voltage Rating=550V, Gender=Male, Mounting Technology="Through Hole"
J2: library part CMP-002-00071-1, "Conn USB 2.0 Type C RCP 24 POS 0.3mm/0.5mm Solder RA SMD 24 Terminal 1 Port T/R"
L1: library part LQG15HS3N9C02D, "FIXED IND 3.9NH 750MA 140MOHM SM", Current Rating (Amps)="750 mA", DC Resistance (DCR)="140mOhm Max", Device Package="0402 (1005 Metric)", Frequency - Self Resonant=6GHz, Inductance="3.9 nH", Inductance Frequency - Test="100 MHz", manufacturer="Murata Electronics", Operating Temperature="-55°C ~ 125°C", Supplier Part Number 1=490-15123-1-ND, Tolerance=±0.2nH, componentlink1description=Datasheet, componentlink1url=https://search.murata.co.jp/Ceramy/image/img/P02/JELF243B-0010.pdf, componentlink2description="DigiKey Link", componentlink2url=https://www.digikey.com/en/products/detail/murata-electronics/LQG15HS3N9C02D/6798548, Height - Seated (Max)="0.022\" (0.55mm)", lastupdated="6/3/2024 8:13:02 PM", Lifecycle Status=Active, Material - Core=Air, Minimum Order=1, Mounting Type="Surface Mount", Package / Case="0402 (1005 Metric)", packaging=TapeAndReel, Part Number=LQG15HS3N9C02D, Part Status=Active, partid=2221, price=0.02, series=LQG15, Shielding=Unshielded, Size / Dimension="0.039\" L x 0.020\" W (1.00mm x 0.50mm)", Supplier 1=DigiKey, Supplier Device Package="0402 (1005 Metric)", Type=Multilayer
L2: "Inductor", Manufacturer_Name=TDK, Mouser Part Number=810-VLS6045EX-150M, Arrow Part Number=VLS6045EX-150M, Arrow Price/Stock=https://www.arrow.com/en/products/vls6045ex-150m/tdk?region=nac, Datasheet Link=https://product.tdk.com/system/files/dam/doc/product/inductor/inductor/smd/catalog/inductor_commercial_power_vls6045ex_en.pdf, Manufacturer_Part_Number=VLS6045EX-150M, Mouser Price/Stock=https://www.mouser.co.uk/ProductDetail/TDK/VLS6045EX-150M?qs=oF%2FSscNnLpDh4m%2FVdQ%2FgKQ%3D%3D
P1: library part CMP-002-00079-1, "Pin Header, Board-to-Board, 2.54 mm, 2 Rows, 6 Contacts, Through Hole, MTLW Series", Max Operating Temperature=125°C, Min Operating Temperature=-55°C
Q1 Q2: "MOSFET (N-Channel)", Manufacturer_Name="Diodes Incorporated", Mouser Part Number=621-DMN3009SFG-7, Datasheet Link=https://www.diodes.com/datasheet/download/DMN3009SFG.pdf, Height=0.8mm, Manufacturer_Part_Number=DMN3009SFG-7, Mouser Price/Stock=https://www.mouser.co.uk/ProductDetail/Diodes-Incorporated/DMN3009SFG-7?qs=NnBbvHfz1MnfgYcTpHZiGg%3D%3D
R1 R2 R12 R13: library part RNCS0805BKE10K0, "RES 10K OHM 0.1% 1/10W 0805", Device Package="0805 (2012 Metric)", manufacturer="Stackpole Electronics Inc", Operating Temperature="-55°C ~ 155°C", Power (Watts)="0.1W, 1/10W", Ratings=AEC-Q200, Resistance="10 kOhms", Supplier Device Package=0805, Supplier Part Number 1=RNCS0805BKE10K0CT-ND, Temperature Coefficient=±25ppm/°C, Tolerance=±0.1%, componentlink1description=Datasheet, componentlink1url=https://www.seielect.com/catalog/sei-rncs_rnch.pdf, componentlink2description="DigiKey Link", componentlink2url=https://www.digikey.com/en/products/detail/stackpole-electronics-inc/RNCS0805BKE10K0/1800067, Composition="Thin Film", Features="Anti-Corrosive, Automotive AEC-Q200, Moisture Resistant", Height - Seated (Max)="0.026\" (0.65mm)", lastupdated="2/8/2024 9:02:39 PM", Lifecycle Status=Active, Minimum Order=1, Number of Terminations=2, Package / Case="0805 (2012 Metric)", packaging=TapeAndReel, Part Number=RNCS0805BKE10K0, Part Status=Active, partid=27713, price=0.07, series=RNCS, Size / Dimension="0.079\" L x 0.049\" W (2.00mm x 1.25mm)", Supplier 1=DigiKey
R3: library part RC0805FR-0768R1L, "RES 68.1 OHM 1% 1/8W 0805", Device Package="0805 (2012 Metric)", manufacturer=Yageo, Operating Temperature="-55°C ~ 155°C", Power (Watts)="0.125W, 1/8W", Resistance="68.1 Ohms", Supplier Device Package=0805, Supplier Part Number 1=311-68.1CRCT-ND, Temperature Coefficient=±100ppm/°C, Tolerance=±1%, componentlink1description=Datasheet, componentlink1url=https://www.yageo.com/upload/media/product/productsearch/datasheet/rchip/PYu-RC_Group_51_RoHS_L_10.pdf, componentlink2description="DigiKey Link", componentlink2url=https://www.digikey.com/en/products/detail/yageo/RC0805FR-0768R1L/728099, Composition="Thick Film", Features="Moisture Resistant", Height - Seated (Max)="0.024\" (0.60mm)", lastupdated="7/25/2024 9:20:18 AM", Lifecycle Status=Active, Minimum Order=1, Number of Terminations=2, Package / Case="0805 (2012 Metric)", packaging=TapeAndReel, Part Number=RC0805FR-0768R1L, Part Status=Active, partid=44821, price=0.01, series=RC_L, Size / Dimension="0.079\" L x 0.049\" W (2.00mm x 1.25mm)", Supplier 1=DigiKey
R4: library part CSM2512FT40L0, "RES 0.04 OHM 1% 3W 2512", Device Package="2512 (6332 Metric)", manufacturer="Stackpole Electronics Inc", Operating Temperature="-55°C ~ 170°C", Power (Watts)=3W, Ratings=AEC-Q200, Resistance="40 mOhms", Supplier Device Package=2512, Supplier Part Number 1=738-CSM2512FT40L0CT-ND, Temperature Coefficient=±50ppm/°C, Tolerance=±1%, componentlink1description=Datasheet, componentlink1url=https://www.seielect.com/Catalog/SEI-CSM.PDF, componentlink2description="DigiKey Link", componentlink2url=https://www.digikey.com/en/products/detail/stackpole-electronics-inc/CSM2512FT40L0/13930213, Composition="Metal Element", Features="Automotive AEC-Q200, Current Sense", Height - Seated (Max)="0.043\" (1.10mm)", lastupdated="6/3/2024 8:27:03 PM", Lifecycle Status=Active, Minimum Order=1, Number of Terminations=2, Package / Case="2512 (6332 Metric)", packaging=TapeAndReel, Part Number=CSM2512FT40L0, Part Status=Active, price=0.19, series=CSM, Size / Dimension="0.252\" L x 0.126\" W (6.40mm x 3.20mm)", Supplier 1=DigiKey
R5: library part TLRP2B10WR010FTD, "RES 0.01 OHM 1% 1W 1206", Device Package="1206 (3216 Metric)", manufacturer="TE Connectivity Passive Product", Operating Temperature="-55°C ~ 170°C", Power (Watts)=1W, Ratings=AEC-Q200, Supplier Device Package=1206, Supplier Part Number 1=1712-TLRP2B10WR010FTDCT-ND, Temperature Coefficient=±75ppm/°C, Tolerance=±1%, componentlink1description=Datasheet, componentlink1url=https://www.te.com/commerce/DocumentDelivery/DDEController?Action=srchrtrv&DocNm=1773449-4&DocType=DS&DocLang=English, componentlink2description="DigiKey Link", componentlink2url=https://www.digikey.com/en/products/detail/te-connectivity-passive-product/TLRP2B10WR010FTD/14652424, Composition="Metal Element", Features="Anti-Sulfur, Automotive AEC-Q200, Current Sense", Height - Seated (Max)="0.026\" (0.65mm)", lastupdated="2/9/2024 8:53:14 PM", Lifecycle Status=Active, Minimum Order=1, Number of Terminations=2, Package / Case="1206 (3216 Metric)", packaging=TapeAndReel, Part Number=TLRP2B10WR010FTD, Part Status=Active, partid=67637, price=0.13, Resistance="10 mOhms", series=TLRP, Size / Dimension="0.124\" L x 0.057\" W (3.15mm x 1.45mm)", Supplier 1=DigiKey
R6: library part CRCW0805100KFKEA, "RES SMD 100K OHM 1% 1/8W 0805", Device Package="0805 (2012 Metric)", manufacturer="Vishay Dale", Operating Temperature="-55°C ~ 155°C", Power (Watts)="0.125W, 1/8W", Ratings=AEC-Q200, Supplier Device Package=0805, Supplier Part Number 1=541-100KCCT-ND, Temperature Coefficient=±100ppm/°C, Tolerance=±1%, componentlink1description=Datasheet, componentlink1url=http://www.vishay.com/docs/20035/dcrcwe3.pdf, componentlink2description="DigiKey Link", componentlink2url=https://www.digikey.com/en/products/detail/vishay-dale/CRCW0805100KFKEA/1175865, Composition="Thick Film", Features="Automotive AEC-Q200", Height - Seated (Max)="0.020\" (0.50mm)", lastupdated="2/8/2024 9:02:17 PM", Lifecycle Status=Active, Minimum Order=1, Number of Terminations=2, Package / Case="0805 (2012 Metric)", packaging=TapeAndReel, Part Number=CRCW0805100KFKEA, Part Status=Active, partid=32640, price=0.01, Resistance="100 kOhms", series=CRCW, Size / Dimension="0.079\" L x 0.049\" W (2.00mm x 1.25mm)", Supplier 1=DigiKey
R7: library part CRCW080510R0FKEAC, "RES 10 OHM 1% 1/8W 0805", Device Package="0805 (2012 Metric)", manufacturer="Vishay Dale", Operating Temperature="-55°C ~ 155°C", Power (Watts)="0.125W, 1/8W", Supplier Device Package=0805, Supplier Part Number 1=541-4132-1-ND, Temperature Coefficient=±100ppm/°C, Tolerance=±1%, componentlink1description=Datasheet, componentlink1url=http://www.vishay.com/docs/28773/crcwce3.pdf, componentlink2description="DigiKey Link", componentlink2url=https://www.digikey.com/en/products/detail/vishay-dale/CRCW080510R0FKEAC/7928554, Composition="Thick Film", Height - Seated (Max)="0.024\" (0.60mm)", lastupdated="2/8/2024 9:01:19 PM", Lifecycle Status=Active, Minimum Order=1, Number of Terminations=2, Package / Case="0805 (2012 Metric)", packaging=TapeAndReel, Part Number=CRCW080510R0FKEAC, Part Status=Active, partid=46232, price=0.01, Resistance="10 Ohms", series=CRCW-C, Size / Dimension="0.079\" L x 0.049\" W (2.00mm x 1.25mm)", Supplier 1=DigiKey
R8: library part CRCW080511K0FKEAHP, "RES SMD 11K OHM 1% 1/2W 0805", Device Package="0805 (2012 Metric)", manufacturer="Vishay Dale", Operating Temperature="-55°C ~ 155°C", Power (Watts)="0.5W, 1/2W", Ratings=AEC-Q200, Resistance="11 kOhms", Supplier Device Package=0805, Supplier Part Number 1=541-CRCW080511K0FKEAHPCT-ND, Temperature Coefficient=±100ppm/°C, Tolerance=±1%, componentlink1description=Datasheet, componentlink1url=https://www.vishay.com/docs/20043/crcwhpe3.pdf, componentlink2description="DigiKey Link", componentlink2url=https://www.digikey.com/en/products/detail/vishay-dale/CRCW080511K0FKEAHP/2227077, Composition="Thick Film", Features="Automotive AEC-Q200, Pulse Withstanding", Height - Seated (Max)="0.020\" (0.50mm)", lastupdated="2/8/2024 9:00:38 PM", Lifecycle Status=Active, Minimum Order=1, Number of Terminations=2, Package / Case="0805 (2012 Metric)", packaging=TapeAndReel, Part Number=CRCW080511K0FKEAHP, Part Status=Active, partid=61644, price=0.02, series=CRCW-HP, Size / Dimension="0.079\" L x 0.049\" W (2.00mm x 1.25mm)", Supplier 1=DigiKey
R9 R11: library part RT0805BRD075K1L, "RES SMD 5.1K OHM 0.1% 1/8W 0805", Device Package="0805 (2012 Metric)", manufacturer=Yageo, Operating Temperature="-55°C ~ 155°C", Power (Watts)="0.125W, 1/8W", Supplier Device Package=0805, Supplier Part Number 1=YAG1938CT-ND, Temperature Coefficient=±25ppm/°C, Tolerance=±0.1%, componentlink1description=Datasheet, componentlink1url=https://www.yageo.com/upload/media/product/productsearch/datasheet/rchip/PYu-RT_1-to-0.01_RoHS_L_11.pdf, componentlink2description="DigiKey Link", componentlink2url=https://www.digikey.com/en/products/detail/yageo/RT0805BRD075K1L/1075977, Composition="Thin Film", Height - Seated (Max)="0.024\" (0.60mm)", lastupdated="7/25/2024 9:20:25 AM", Lifecycle Status=Active, Minimum Order=1, Number of Terminations=2, Package / Case="0805 (2012 Metric)", packaging=TapeAndReel, Part Number=RT0805BRD075K1L, Part Status=Active, partid=32968, price=0.04, Resistance="5.1 kOhms", series=RT, Size / Dimension="0.079\" L x 0.049\" W (2.00mm x 1.25mm)", Supplier 1=DigiKey
R10: library part CRCW0805100RFKEAC, "RES 100 OHM 1% 1/8W 0805", Device Package="0805 (2012 Metric)", manufacturer="Vishay Dale", Operating Temperature="-55°C ~ 155°C", Power (Watts)="0.125W, 1/8W", Supplier Device Package=0805, Supplier Part Number 1=541-3979-1-ND, Temperature Coefficient=±100ppm/°C, Tolerance=±1%, componentlink1description=Datasheet, componentlink1url=http://www.vishay.com/docs/28773/crcwce3.pdf, componentlink2description="DigiKey Link", componentlink2url=https://www.digikey.com/en/products/detail/vishay-dale/CRCW0805100RFKEAC/7928401, Composition="Thick Film", Height - Seated (Max)="0.024\" (0.60mm)", lastupdated="2/8/2024 9:01:05 PM", Lifecycle Status=Active, Minimum Order=1, Number of Terminations=2, Package / Case="0805 (2012 Metric)", packaging=TapeAndReel, Part Number=CRCW0805100RFKEAC, Part Status=Active, partid=47768, price=0.01, Resistance="100 Ohms", series=CRCW-C, Size / Dimension="0.079\" L x 0.049\" W (2.00mm x 1.25mm)", Supplier 1=DigiKey
R14: library part RMCF0805FT64K9, "RES 64.9K OHM 1% 1/8W 0805", Device Package="0805 (2012 Metric)", manufacturer="Stackpole Electronics Inc", Operating Temperature="-55°C ~ 155°C", Power (Watts)="0.125W, 1/8W", Ratings=AEC-Q200, Supplier Device Package=0805, Supplier Part Number 1=738-RMCF0805FT64K9CT-ND, Temperature Coefficient=±100ppm/°C, Tolerance=±1%, componentlink1description=Datasheet, componentlink1url=https://www.seielect.com/catalog/sei-packaging.pdf, componentlink2description="DigiKey Link", componentlink2url=https://www.digikey.com/en/products/detail/stackpole-electronics-inc/RMCF0805FT64K9/1713303, Composition="Thick Film", Features="Automotive AEC-Q200", Height - Seated (Max)="0.026\" (0.65mm)", lastupdated="2/8/2024 9:01:11 PM", Lifecycle Status=Active, Minimum Order=1, Number of Terminations=2, Package / Case="0805 (2012 Metric)", packaging=CutTape, Part Number=RMCF0805FT64K9, Part Status=Active, partid=47058, price=0.01, Resistance="64.9 kOhms", series=RMCF, Size / Dimension="0.079\" L x 0.049\" W (2.00mm x 1.25mm)", Supplier 1=DigiKey
R15: library part Y40221K00000T0R, "RES SMD 1K OHM 0.01% 1/5W 0805", Device Package="0805 (2012 Metric)", manufacturer="Vishay Foil Resistors (Division of Vishay Precision Group)", Operating Temperature="-55°C ~ 150°C", Power (Watts)="0.2W, 1/5W", Supplier Device Package=0805, Supplier Part Number 1=Y4022-1.0KBCT-ND, Temperature Coefficient=±0.2ppm/°C, Tolerance=±0.01%, componentlink1description=Datasheet, componentlink1url=http://www.vishaypg.com/docs/63209/FRSM.pdf, componentlink2description="DigiKey Link", componentlink2url=https://www.digikey.com/en/products/detail/vishay-foil-resistors-division-of-vishay-precision-group/Y40221K00000T0R/2640995, Composition="Metal Foil", Features="Moisture Resistant, Non-Inductive", Height - Seated (Max)="0.025\" (0.64mm)", lastupdated="2/8/2024 9:02:07 PM", Lifecycle Status=Active, Minimum Order=1, Number of Terminations=2, Package / Case="0805 (2012 Metric)", packaging=TapeAndReel, Part Number=Y40221K00000T0R, Part Status=Active, partid=34935, price=12.16, Resistance="1 kOhms", series=FRSM, Size / Dimension="0.080\" L x 0.050\" W (2.03mm x 1.27mm)", Supplier 1=DigiKey
R16: library part AC0805JR-0727KL, "RES SMD 27K OHM 5% 1/8W 0805", Device Package="0805 (2012 Metric)", manufacturer=Yageo, Operating Temperature="-55°C ~ 155°C", Power (Watts)="0.125W, 1/8W", Ratings=AEC-Q200, Supplier Device Package=0805, Supplier Part Number 1=13-AC0805JR-0727KLCT-ND, Temperature Coefficient=±100ppm/°C, Tolerance=±5%, componentlink1description=Datasheet, componentlink1url=https://www.yageo.com/upload/media/product/productsearch/datasheet/rchip/PYu-AC_51_RoHS_L_10.pdf, componentlink2description="DigiKey Link", componentlink2url=https://www.digikey.com/en/products/detail/yageo/AC0805JR-0727KL/5897103, Composition="Thick Film", Features="Automotive AEC-Q200, Moisture Resistant", Height - Seated (Max)="0.024\" (0.60mm)", lastupdated="7/25/2024 9:20:06 AM", Lifecycle Status=Active, Minimum Order=1, Number of Terminations=2, Package / Case="0805 (2012 Metric)", packaging=TapeAndReel, Part Number=AC0805JR-0727KL, partid=84032, price=0.01, Resistance="27 kOhms", series=AC, Size / Dimension="0.079\" L x 0.049\" W (2.00mm x 1.25mm)", Supplier 1=DigiKey
R17: library part SFR10EZPJ220, "RES 22 OHM 5% 1/8W 0805", Device Package="0805 (2012 Metric)", manufacturer="Rohm Semiconductor", Operating Temperature="-55°C ~ 155°C", Power (Watts)="0.125W, 1/8W", Ratings=AEC-Q200, Supplier Device Package=0805, Supplier Part Number 1=511-SFR10EZPJ220CT-ND, Temperature Coefficient=±200ppm/°C, Tolerance=±5%, componentlink1description=Datasheet, componentlink1url=https://fscdn.rohm.com/en/products/databook/datasheet/passive/resistor/chip_resistor/sfr-e.pdf, componentlink2description="DigiKey Link", componentlink2url=https://www.digikey.com/en/products/detail/rohm-semiconductor/SFR10EZPJ220/17944490, Composition="Thick Film", Features="Anti-Sulfur, Automotive AEC-Q200", Height - Seated (Max)="0.026\" (0.65mm)", lastupdated="2/8/2024 9:00:13 PM", Lifecycle Status=Active, Minimum Order=1, Number of Terminations=2, Package / Case="0805 (2012 Metric)", packaging=TapeAndReel, Part Number=SFR10EZPJ220, Part Status=Active, partid=73570, price=0.01, Resistance="22 Ohms", series=SFR, Size / Dimension="0.079\" L x 0.049\" W (2.00mm x 1.25mm)", Supplier 1=DigiKey
R18 R19: library part RT0805BRD075K1L, "RES SMD 5.1K OHM 0.1% 1/8W 0805", Device Package="0805 (2012 Metric)", manufacturer=Yageo, Operating Temperature="-55°C ~ 155°C", Power (Watts)="0.125W, 1/8W", Resistance="5.1 kOhms", Supplier Device Package=0805, Supplier Part Number 1=YAG1938CT-ND, Temperature Coefficient=±25ppm/°C, Tolerance=±0.1%, componentlink1description=Datasheet, componentlink1url=https://www.yageo.com/upload/media/product/productsearch/datasheet/rchip/PYu-RT_1-to-0.01_RoHS_L_11.pdf, componentlink2description="DigiKey Link", componentlink2url=https://www.digikey.com/en/products/detail/yageo/RT0805BRD075K1L/1075977, Composition="Thin Film", Height - Seated (Max)="0.024\" (0.60mm)", lastupdated="7/25/2024 9:20:25 AM", Lifecycle Status=Active, Minimum Order=1, Number of Terminations=2, Package / Case="0805 (2012 Metric)", packaging=TapeAndReel, Part Number=RT0805BRD075K1L, Part Status=Active, partid=32968, price=0.04, series=RT, Size / Dimension="0.079\" L x 0.049\" W (2.00mm x 1.25mm)", Supplier 1=DigiKey
SW1: library part CMP-011-00014-1, "Switch Tactile N.O. SPST Round Button PC Pins 0.05A 50VDC 1.57N Thru-Hole", Current Rating=50mA, Max Operating Temperature=70°C, Min Operating Temperature=-20°C, Max Current Rating=50mA, Mounting Technology="Through Hole", Throw Configuration=SPST
U1: library part CMP-031-00007-6, "Ultra-low-power, Arm Cortex-M33 Trust Zone MCU 100 MHz with 1 Mbyte of Flash memory,  Bluetooth LE 5.4", Manufacturer_Name=STMicroelectronics, Manufacturer_Part_Number=STM32WBA52KGU6, Component Type=Standard, Copyright="Copyright (C) 2025 Ultra Librarian. All rights reserved.", Datasheet=https://www.st.com/resource/en/datasheet/stm32wba52ce.pdf, Design Item ID=STM32WBA52KGU6_1, Pins=33, RefDes=RefDes, Source=STM32WBA52KGU6.SchLib, Type=Type
Y1: "Crystal or Oscillator", Manufacturer_Name="Murata Electronics", Mouser Part Number=81-XRCGB32M000F2P01R, Arrow Part Number=XRCGB32M000F2P01R0, Arrow Price/Stock=https://www.arrow.com/en/products/xrcgb32m000f2p01r0/murata-manufacturing?region=nac, Datasheet Link=https://www.murata.com/products/productdata/8801065500702/SPEC-XRCGB32M000F2P01R0.pdf, Height=0.7mm, Manufacturer_Part_Number=XRCGB32M000F2P01R0, Mouser Price/Stock=https://www.mouser.co.uk/ProductDetail/Murata-Electronics/XRCGB32M000F2P01R0?qs=rrS6PyfT74czmgr%252Bqfmsyw%3D%3D

## Via types
v1: diameter 0.5, hole 0.2, Top Copper to Bottom Copper, 280 vias
v2: diameter 0.6, hole 0.3, Top Copper to Bottom Copper, 18 vias
v3: diameter 0.8, hole 0.4, Top Copper to Bottom Copper, 7 vias

## Nets (pads, with @x,y where several pads share a name; then routed paths per layer and width w, separated by ;. In a path a pad name is that pad's centre, name@x,y a point inside that pad or via, vN(x,y) a via of type N, cw(c..) or ccw(c..) an arc to the next point about the centre after c; other vN are vias at no path point)
+2.9V: C1.2 C2.2 C3.2 C4.2 C5.2 C6.2 C7.2 C8.2 C14.2 C20.2 IC3.3 J1.1 L2.2 P1.6 R1.2 R14.2 R17.2 R18.2 R19.2 U1.5 U1.14 U1.23 U1.27 U1.30 U1.31 | length 132.6
  Top Copper w0.25: R17.2@52.778,80.088 52.911,79.955 v1(52.911,79.025)
  Top Copper w0.3: v2@58.934,71.307 60.007,71.307 60.19,71.124 U1.5 ; U1.31 62.25,74.25 61.694,74.806 61.23,74.806 60.965,75.07 v2(60.884,75.07) 61.4,75.586 61.4,76.1 C6.2 62.3,76.2 62.3,75.386 62.752,74.933 62.752,73.964 62.75,73.962 U1.30@62.75,73.726 ; v2@64.24,68.04 64.25,68.05 U1.14 ; U1.27 64.25,75.45 65.001,76.201 65.001,76.501 C8.2 ; v2@64.257,68.009 v2(64.264,68.016) 64.857,68.016 65.137,67.736 65.4,67.736 65.9,67.236 C14.2 ; IC3.3 64.362,65.687 64.36,65.689 64.36,66.06 64.759,66.459 64.95,66.65 65.4,66.65 65.467,66.717 C14.2@65.467,66.767 ; U1.23 67.655,72.624 68.015,72.265 v2(68.058,72.265)
  Top Copper w0.4: C14.2@65.467,66.767 C14.2
  Top Copper w0.5: J1.1 R1.2 ; C7.2@65.5,78.8 65.9,79.2 v1(65.9,80.6) ; C8.2@65.531,77 C7.2@65.531,78.742
  Signal Layer 2 w0.3: 73.9,60.8 74.932,60.8 75.931,59.801 78.499,59.801 P1.6
  Signal Layer 2 w0.8: v1(52.911,79.025) 52.911,74.989 55.581,72.319 56.3,72.319 ; 58,64.8 58.919,65.719 58.919,69.7 ; v2(58.919,71.321) 58.919,69.7 ; 60.2,64 60.2,59.07 J1.1 ; 60.4,64.4 62.5,64.4 ; v2(60.884,75.07) 59.7,75.07 ; v2(64.264,68.016) 64.264,66.164 ; v1(65.9,80.6) 64.982,80.6 59.7,75.318 59.7,75.07 ; v2(68.058,72.265) 69.035,72.265 70.4,70.9 70.4,68.1 69.2,66.9 65,66.9 64.264,66.164 ; 73.875,60.825 66.075,60.825 62.5,64.4 ; 56.3,72.319 56.3,74 57.37,75.07 59.7,75.07 ; 56.3,72.319 58.919,69.7 ; 62.5,64.4 64.264,66.164
  Bottom Copper w0.3: v1(52.911,79.025) 52.911,76.981 54.081,75.81 56.24,75.81 R19.2 56.65,75.7 58.197,75.7 R18.2 ; C5.2@60.483,76.162 60.572,76.162 60.884,75.85 v2(60.884,75.07) ; v2(64.264,68.016) 64.3,67.979 64.3,66.95 64.572,66.95 C3.2@64.972,67.35
  Bottom Copper w0.4: v2(68.058,72.265) 68.058,72.319 68.591,72.852 68.734,72.995 69.401,72.995 C1.2
  Bottom Copper w0.5: R14.2 53.378,61.503 53.941,61.503 54.9,62.462 v3(54.9,64.3) ; v2(58.919,71.321) 59.596,71.321 59.651,71.376 60.301,71.376 60.855,70.822 61.272,70.822 61.381,70.712 C2.2@61.381,70.3 ; J1.1 J1.1@60.6,59.33 ; C3.2@64.114,66.414 C3.2 ; C4.2 67.866,72.1 68.031,72.265 v2(68.058,72.265)
  other v3: 38.75,66.5 40,66.5 41.1,66.5 42.5,66.5
+VBUS: C15.2 C22.2 D2.1 IC1.1 IC2.5 J2.A4-B9 J2.B4-A9 R5.1 R13.1 | length 19.5
  Top Copper w0.3: v1(50.349,68.25) 50.387,68.288 50.688,68.288 51.2,68.8 IC1.1
  Signal Layer 1 w0.8: v3(47.728,68.435) 47.728,61.869 v3(50.695,58.902)